# Altium PCB exampleModule_TYPE3042.PcbDoc
Units mm, origin at the board's own origin, x right, y up, seen from the top; angles counter-clockwise.
Board outline 42 x 30 mm, 4 copper layers (Top Layer, Int1 (GND), Int2 (PWR), Bottom Layer), stack 0.77 mm thick; 1 components, 39 nets, 67 pads, 0 vias.
Unrouted connection lines stored in the file: 14.
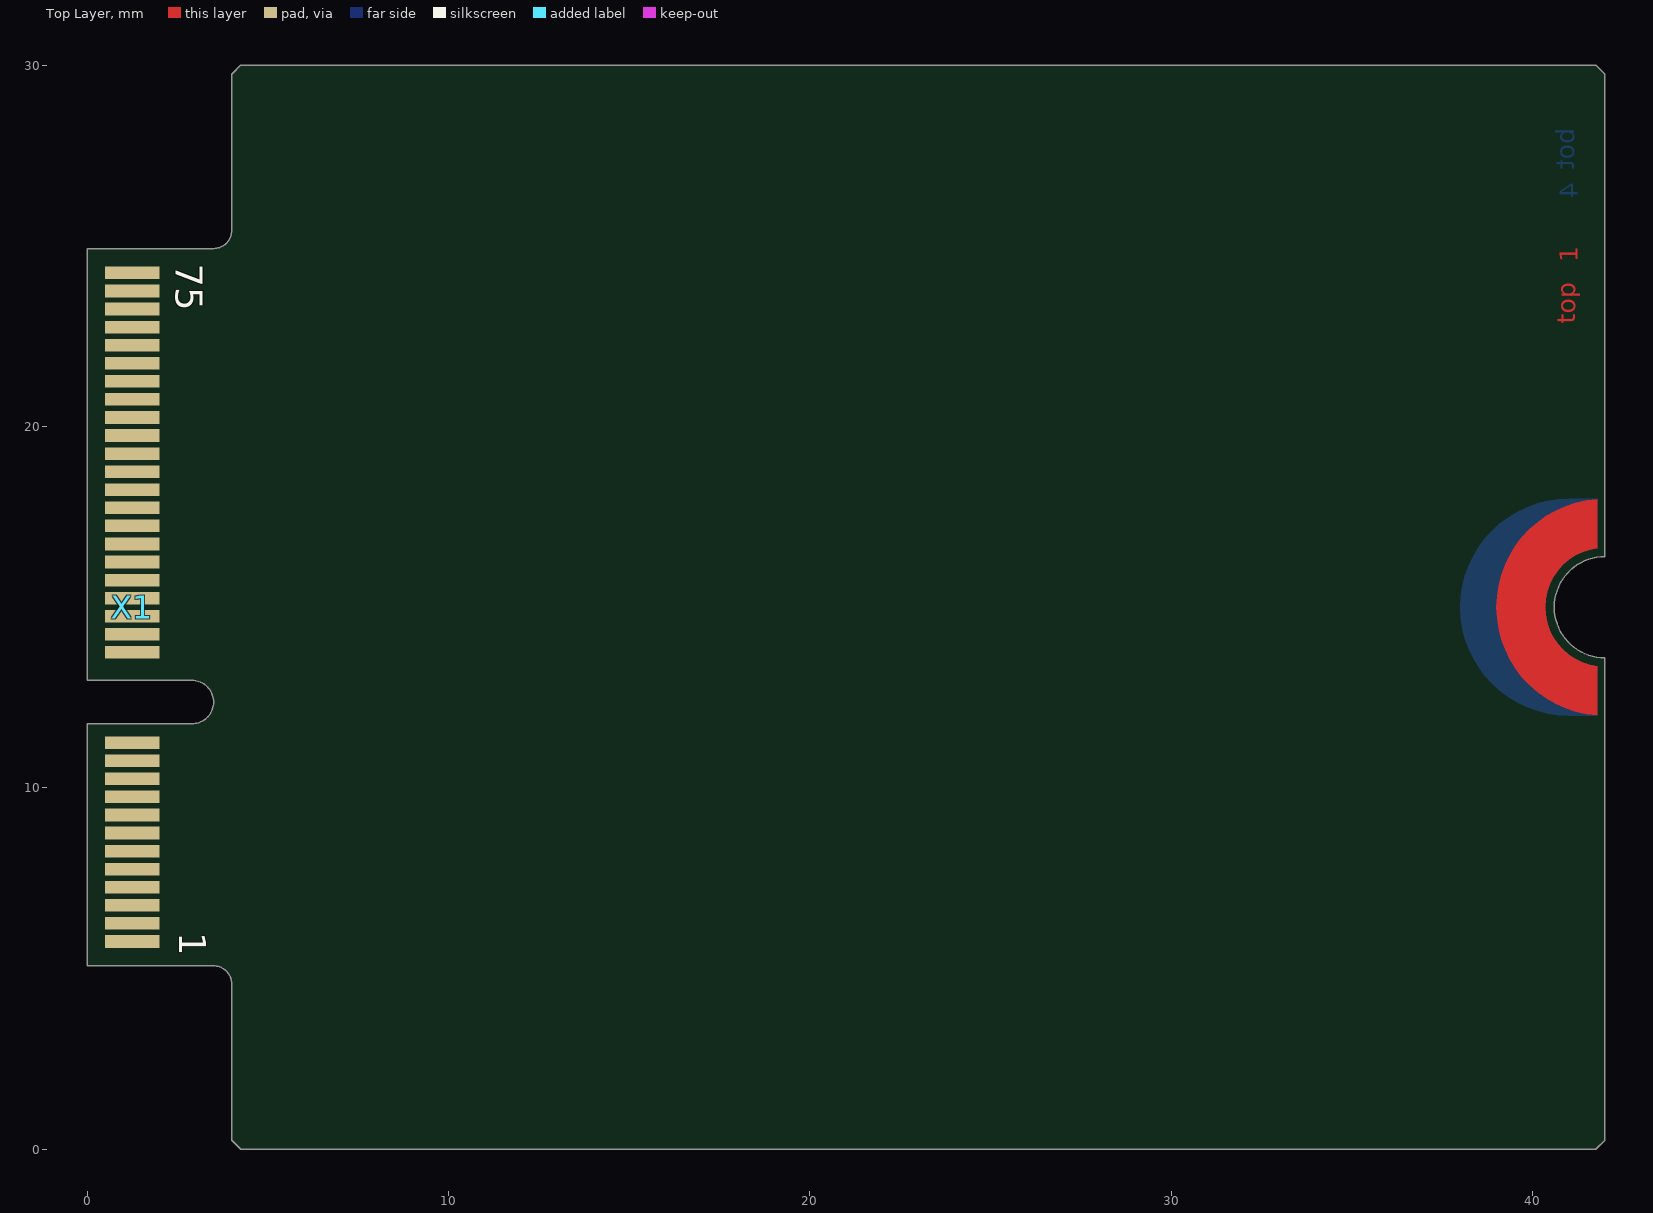
[diagram p0: Top Layer view]
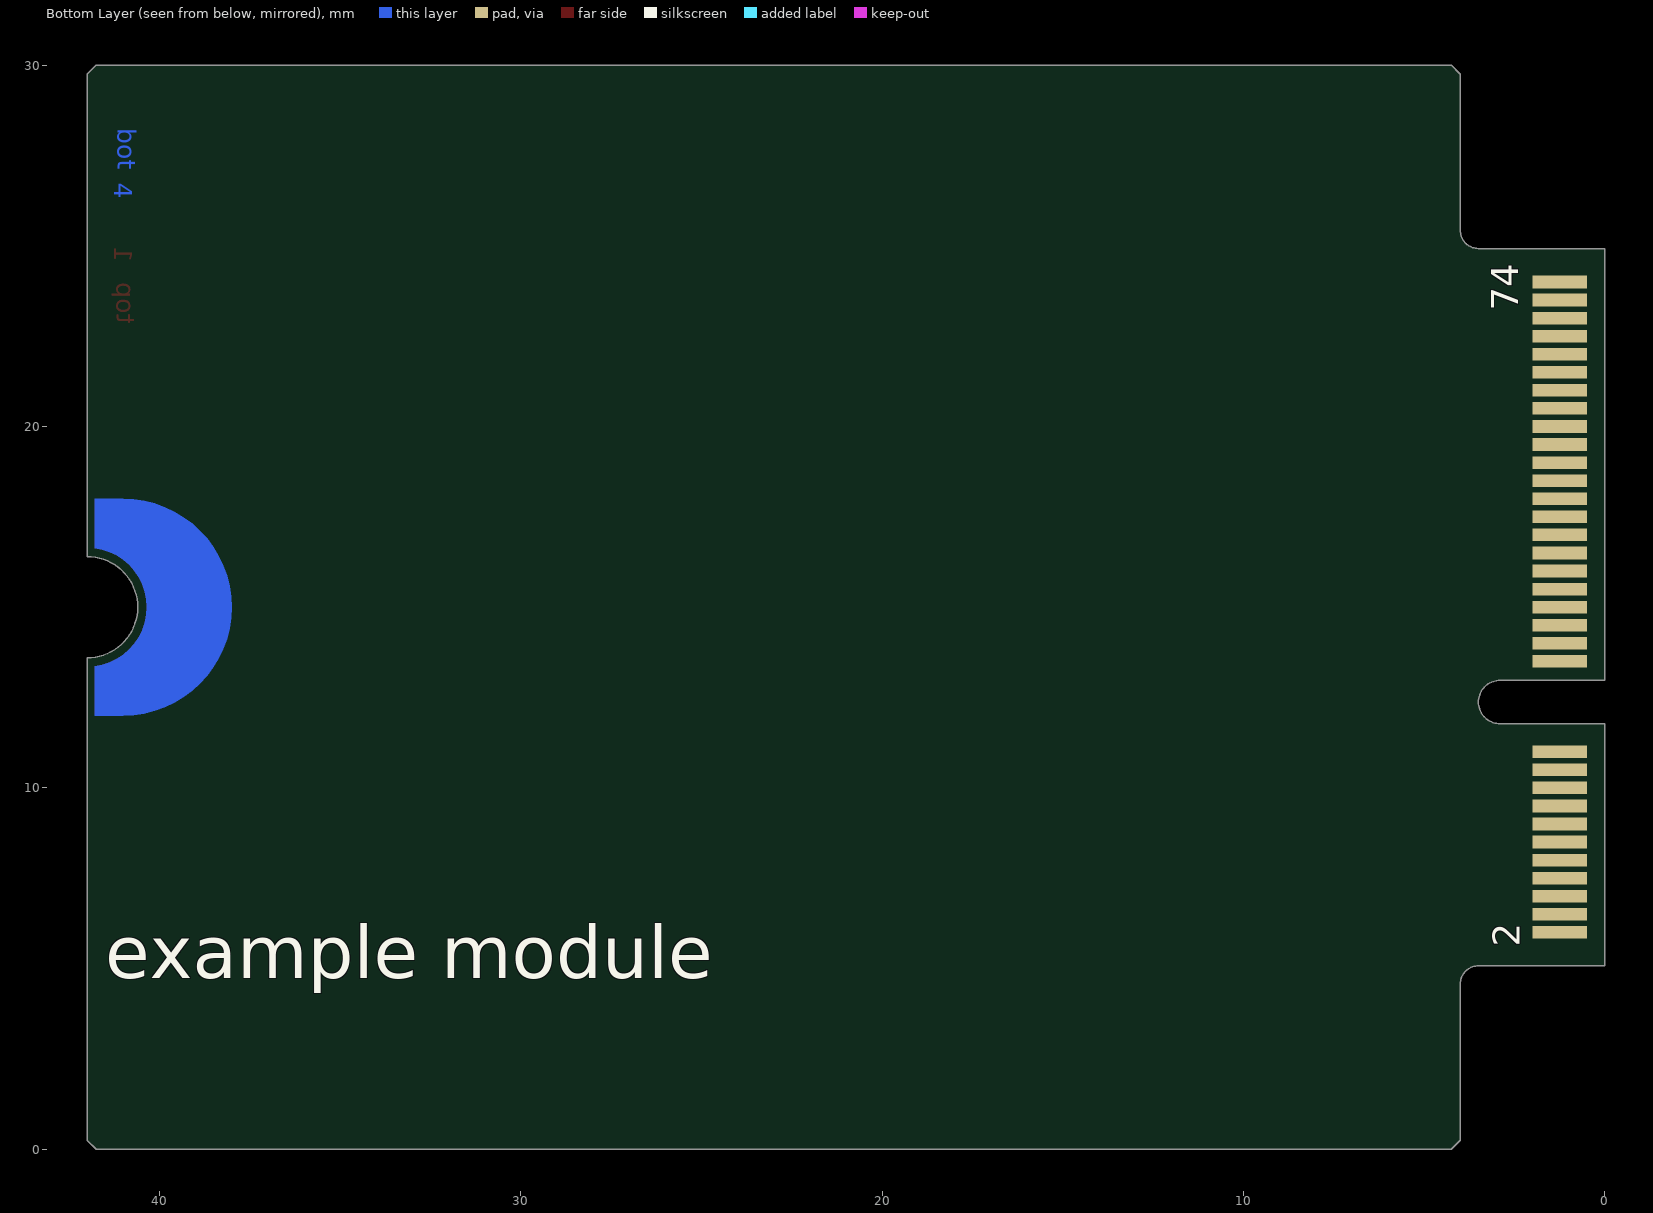
[diagram p1: Bottom Layer view, seen from below]
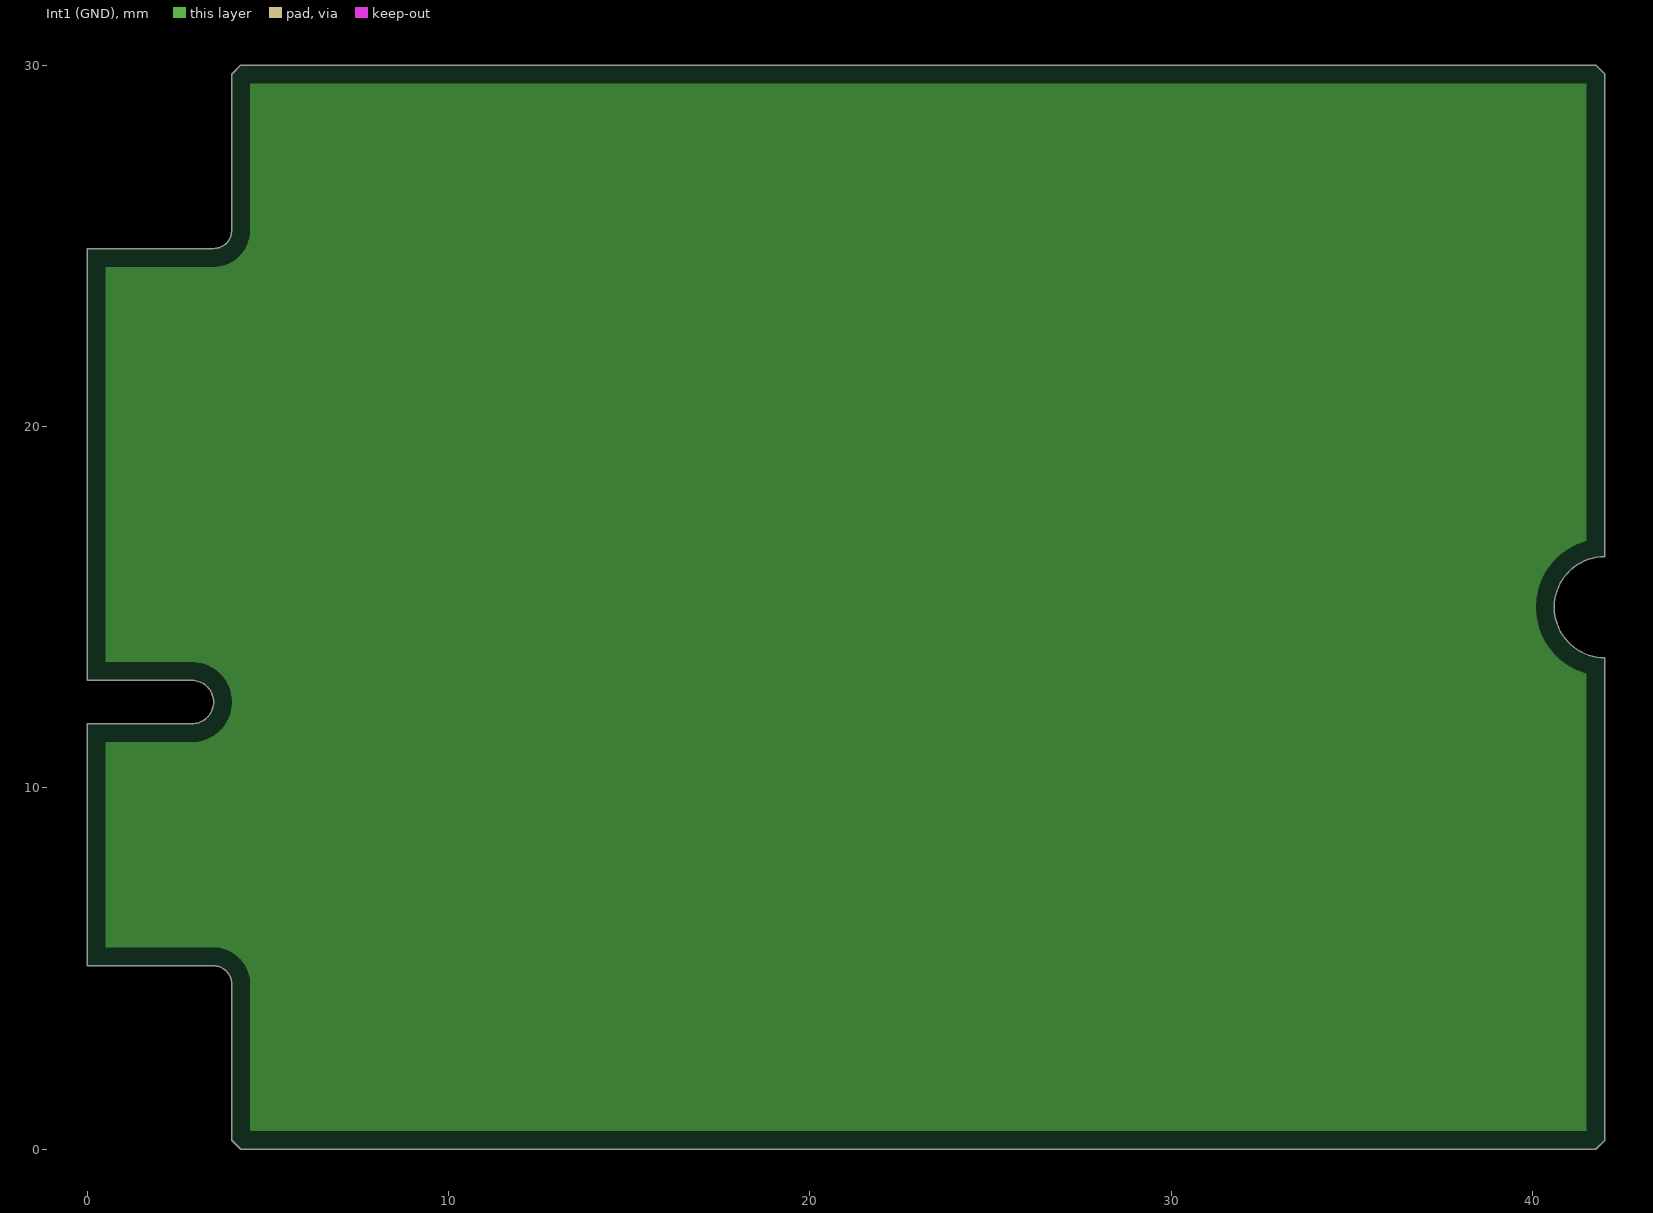
[diagram p2: Int1 (GND), clearances drawn from the general rule]
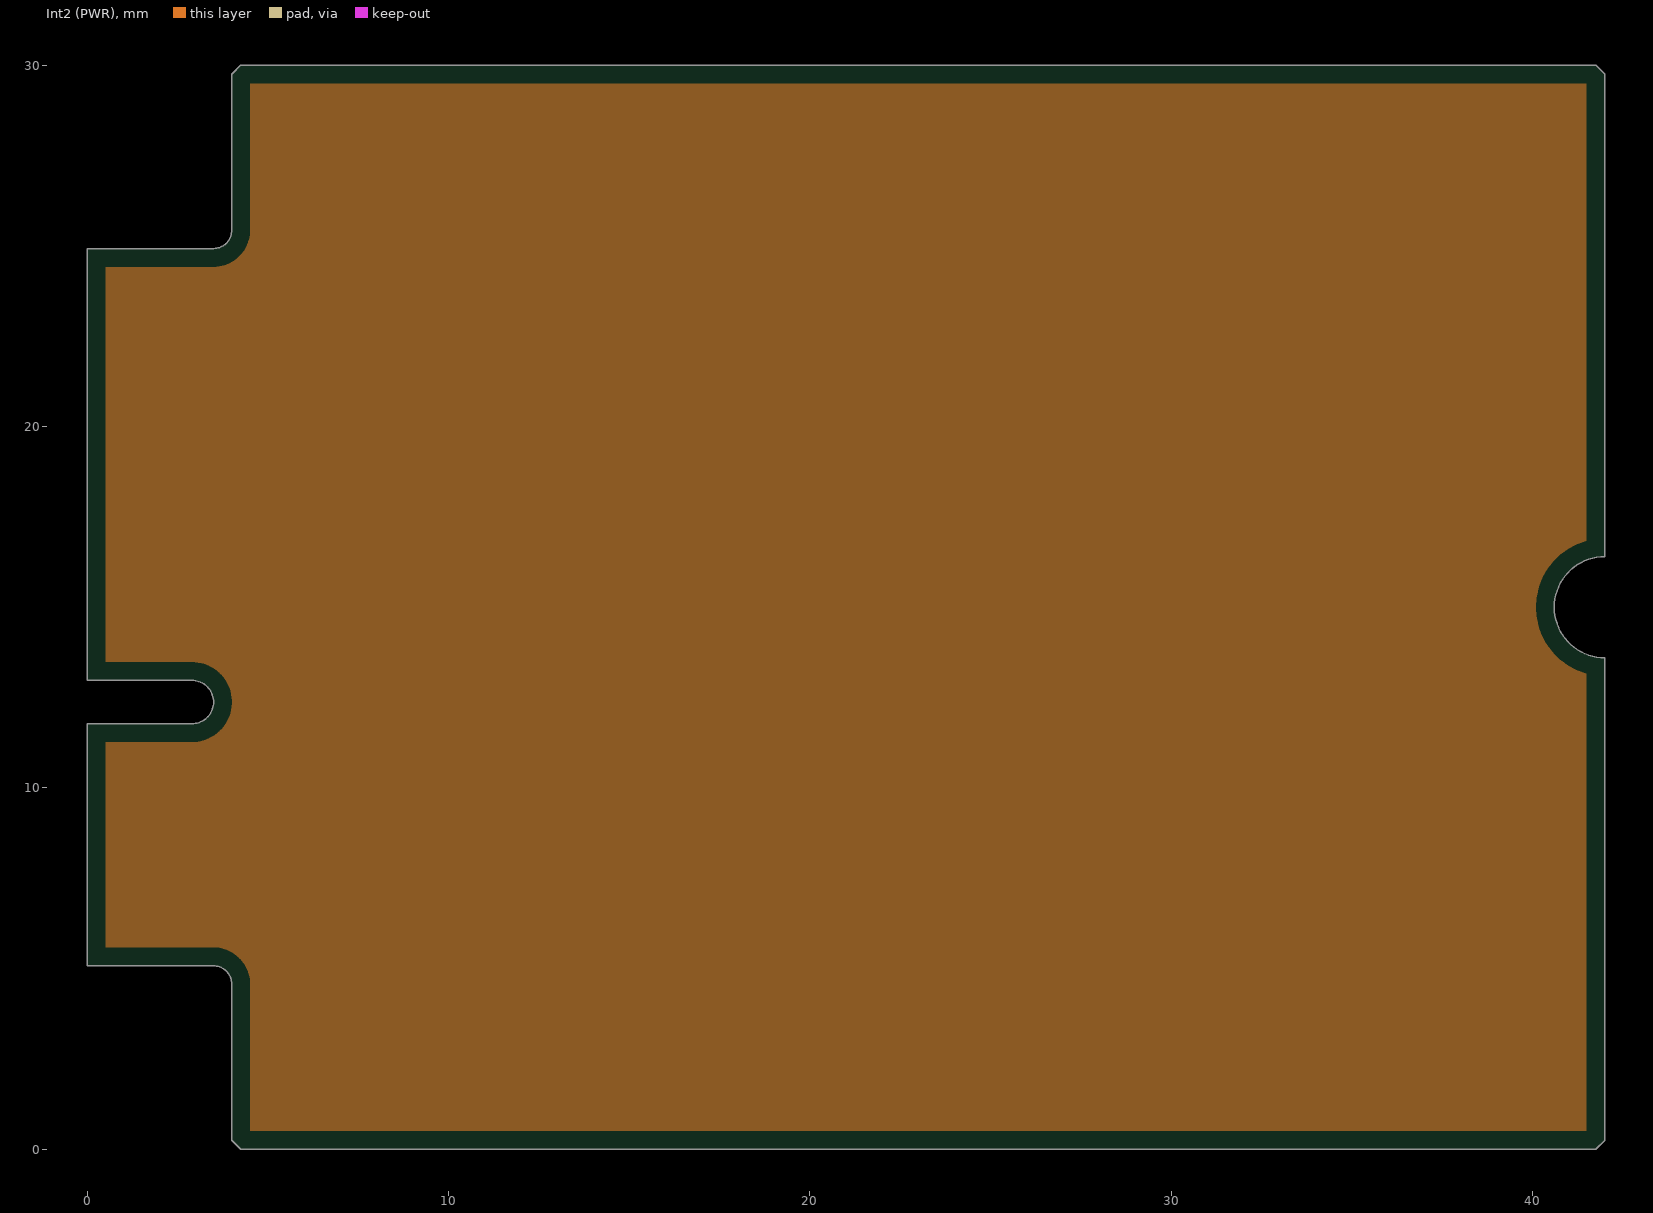
[diagram p3: Int2 (PWR), clearances drawn from the general rule]

## Layer stack, top to bottom
Top Solder: solder mask 0.0254, SM-001, Dk 4
Top Layer: signal copper 0.035
Dielectric 1: prepreg 0.1118, PP-015, Dk 4.3
Int1 (GND): plane copper 0.035
Dielectric 3: core 0.4064, Core-034, Dk 4.6
Int2 (PWR): plane copper 0.035
Dielectric 5: prepreg 0.1118, PP-015, Dk 4.3
Bottom Layer: signal copper 0.035
Bottom Solder: solder mask 0.0254, SM-001, Dk 4

## Board outline
4,0.25 4,4.575 ccw(c3.5,4.575) 3.5,5.075 0,5.075 0,11.775 2.9,11.775 ccw(c2.9,12.375) 3.5,12.375 ccw(c2.9,12.375) 2.9,12.975 0,12.975 0,24.925 3.5,24.925 ccw(c3.5,25.425) 4,25.425 4,29.75 4.25,30 41.75,30 42,29.75 42,16.4 ccw(c42,15) 40.6,15 ccw(c42,15) 42,13.6 42,0.25 41.75,0 4.25,0

## Design rules (kind name [scope] priority, off if disabled: settings)
BoardOutlineClearance [All] p1: gap=0.2 ignorepadtopadclearanceinfootprint=FALSE
Clearance [All] p1: gap=0.1 ignorepadtopadclearanceinfootprint=FALSE
DiffPairsRouting DiffPairsRouting_100R [InDifferentialPairClass('DP_100R')] p1: maxlimit=0.15 minlimit=0.15 mostfreqgap=0.15 toplayer_minwidth=0.11 toplayer_maxwidth=0.11 toplayer_prefwidth=0.11 bottomlayer_minwidth=0.11 bottomlayer_maxwidth=0.11 bottomlayer_prefwidth=0.11 impedanceprofiledriven=TRUE impedanceprofileid={D0ED966C-66EA-42B8-8657-787F2A77329B} impedanceprofilevalue=100.000000 maxuncoupledlength=12.7
DiffPairsRouting [All] p2: maxlimit=0.254 minlimit=0.254 mostfreqgap=0.254 toplayer_minwidth=0.381 toplayer_maxwidth=0.381 toplayer_prefwidth=0.381 bottomlayer_minwidth=0.381 bottomlayer_maxwidth=0.381 bottomlayer_prefwidth=0.381 maxuncoupledlength=12.7
PlaneClearance [All] p1: clearance=0.508
PlaneConnect [All] p1: pad.planeconnectstyle=Relief pad.reliefexpansion=0.508 pad.reliefentries=4 pad.reliefconductorwidth=0.254 pad.reliefairgap=0.254 via.planeconnectstyle=Direct via.reliefexpansion=0.508 via.reliefentries=4 via.reliefconductorwidth=0.254 via.reliefairgap=0.254
PolygonConnect [All] p1: thpad.connectstyle=Relief thpad.reliefconductorwidth=0.254 thpad.reliefentries=4 thpad.polygonreliefangle="90 Angle" thpad.airgapwidth=0.254 smdpad.connectstyle=Relief smdpad.reliefconductorwidth=0.254 smdpad.reliefentries=4 smdpad.polygonreliefangle="90 Angle" smdpad.airgapwidth=0.254 via.connectstyle=Direct via.reliefconductorwidth=0.254 via.reliefentries=4 via.polygonreliefangle="90 Angle" via.airgapwidth=0.254
RoutingVias [All] p1: holewidth=0.2 width=0.4 viastyle="Through Hole" minholewidth=0.2 minwidth=0.4 maxholewidth=3 maxwidth=6
SolderMaskExpansion [All] p1: expansion=0.102 istentingtop=FALSE
Width Width_50R [InNetClass('SE_50R')] p1: maxlimit=0.172 minlimit=0.172 preferedwidth=0.172 impedanceprofiledriven=TRUE impedanceprofileid={CEA07893-88F1-4413-85C8-7467995CDE0A} impedanceprofilevalue=50.000000 minimp=50.000000 maximp=50.000000 favimp=50.000000
Width [All] p2: maxlimit=4 minlimit=0.1 preferedwidth=0.125
27 further rules are at their usual default settings.

## Classes and differential pairs
differential pair class DP_100R: FMC_GP_D1 FMC_GP_D2 FMC_GP_D3 FMC_GP_D4 FMC_GP_D5 FMC_GP_D6 FMC_GP_D7
net class SE_50R: FMC_GP_S0 FMC_GP_S1 FMC_GP_S2 FMC_GP_S3 FMC_GP_S4 FMC_GP_S5 FMC_GP_S6 FMC_GP_S7
net class S_GP: FMC_GP_S0 FMC_GP_S1 FMC_GP_S2 FMC_GP_S3 FMC_GP_S4 FMC_GP_S5 FMC_GP_S6 FMC_GP_S7
net class FMC_GP_S[0..7]: FMC_GP_S0 FMC_GP_S1 FMC_GP_S2 FMC_GP_S3 FMC_GP_S4 FMC_GP_S5 FMC_GP_S6 FMC_GP_S7
net class FMC_GP_D_P[0..7]: FMC_GP_D_P0 FMC_GP_D_P1 FMC_GP_D_P2 FMC_GP_D_P3 FMC_GP_D_P4 FMC_GP_D_P5 FMC_GP_D_P6 FMC_GP_D_P7
net class FMC_GP_D_N[0..7]: FMC_GP_D_N0 FMC_GP_D_N1 FMC_GP_D_N2 FMC_GP_D_N3 FMC_GP_D_N4 FMC_GP_D_N5 FMC_GP_D_N6 FMC_GP_D_N7
net class DP_GP: FMC_GP_D_N1 FMC_GP_D_N2 FMC_GP_D_N3 FMC_GP_D_N4 FMC_GP_D_N5 FMC_GP_D_N6 FMC_GP_D_N7 FMC_GP_D_P1 FMC_GP_D_P2 FMC_GP_D_P3 FMC_GP_D_P4 FMC_GP_D_P5 FMC_GP_D_P6 FMC_GP_D_P7
differential pair FMC_GP_D7: +FMC_GP_D_P7 -FMC_GP_D_N7
differential pair FMC_GP_D6: +FMC_GP_D_P6 -FMC_GP_D_N6
differential pair FMC_GP_D5: +FMC_GP_D_P5 -FMC_GP_D_N5
differential pair FMC_GP_D4: +FMC_GP_D_P4 -FMC_GP_D_N4
differential pair FMC_GP_D3: +FMC_GP_D_P3 -FMC_GP_D_N3
differential pair FMC_GP_D2: +FMC_GP_D_P2 -FMC_GP_D_N2
differential pair FMC_GP_D1: +FMC_GP_D_P1 -FMC_GP_D_N1

## Components (designator, comment, footprint, x,y, rotation, side; value= is the part's Value field where it differs from the comment)
X1 "CONN PWR CARD EDGE PCB SLOT MALE" CON-67_0.5MM_PCB_SLOT 1.25,15 r270 top

## Footprints (in the part's own frame and the unit in brackets; to place one, negate y for a bottom-side part, rotate by r counter-clockwise, add the part's x,y. Pads: shape width x height; smd on the part's side, far side on the other; paste and mask are expansions set on the pad)
CON-67_0.5MM_PCB_SLOT [mm] "Connector 67, 0.5mm pitch - No BOM"
  rect 0.35x1.5 smd: 1(9.25,0) 3(8.75,0) 5(8.25,0) 7(7.75,0) 9(7.25,0) 11(6.75,0) 13(6.25,0) 15(5.75,0) 17(5.25,0) 19(4.75,0) 21(4.25,0) 23(3.75,0) 33(1.25,0) 35(0.75,0) 37(0.25,0) 39(-0.25,0) 41(-0.75,0) 43(-1.25,0) 45(-1.75,0) 47(-2.25,0) 49(-2.75,0) 51(-3.25,0) 53(-3.75,0) 55(-4.25,0) 57(-4.75,0) 59(-5.25,0) 61(-5.75,0) 63(-6.25,0) 65(-6.75,0) 67(-7.25,0) 69(-7.75,0) 71(-8.25,0) 73(-8.75,0) 75(-9.25,0)
  rect 0.35x1.5 smd far side: 2(9,0) 4(8.5,0) 6(8,0) 8(7.5,0) 10(7,0) 12(6.5,0) 14(6,0) 16(5.5,0) 18(5,0) 20(4.5,0) 22(4,0) 32(1.5,0) 34(1,0) 36(0.5,0) 38(0,0) 40(-0.5,0) 42(-1,0) 44(-1.5,0) 46(-2,0) 48(-2.5,0) 50(-3,0) 52(-3.5,0) 54(-4,0) 56(-4.5,0) 58(-5,0) 60(-5.5,0) 62(-6,0) 64(-6.5,0) 66(-7,0) 68(-7.5,0) 70(-8,0) 72(-8.5,0) 74(-9,0)

## Part data
X1: library part CMP-01224-1, "Mates with 2199119-4 - No BOM", Card Thickness=0.8mm, Card Type="Non Specified - Dual Edge", Gender=Male, Mates with=2199119-4, Number of Positions=67, Pitch=0.5mm

## Nets (pads, with @x,y where several pads share a name; then routed paths per layer and width w, separated by ;. In a path a pad name is that pad's centre, name@x,y a point inside that pad or via, vN(x,y) a via of type N, cw(c..) or ccw(c..) an arc to the next point about the centre after c; other vN are vias at no path point)
3V3_CON: X1.2 X1.4 X1.72 X1.74
FMC_12V: X1.38
FMC_ADJ_CON: X1.40 X1.42
FMC_GP_D_N0: X1.5
FMC_GP_D_N1: X1.37
FMC_GP_D_N2: X1.43
FMC_GP_D_N3: X1.49
FMC_GP_D_N4: X1.55
FMC_GP_D_N5: X1.61
FMC_GP_D_N6: X1.67
FMC_GP_D_N7: X1.73
FMC_GP_D_P0: X1.3
FMC_GP_D_P1: X1.35
FMC_GP_D_P2: X1.41
FMC_GP_D_P3: X1.47
FMC_GP_D_P4: X1.53
FMC_GP_D_P5: X1.59
FMC_GP_D_P6: X1.65
FMC_GP_D_P7: X1.71
FMC_GP_S0: X1.9
FMC_GP_S1: X1.11
FMC_GP_S2: X1.13
FMC_GP_S3: X1.15
FMC_GP_S4: X1.17
FMC_GP_S5: X1.19
FMC_GP_S6: X1.21
FMC_GP_S7: X1.23
GND: X1.1 X1.7 X1.18 X1.33 X1.39 X1.45 X1.51 X1.57 X1.63 X1.69 X1.75
I2C_SCL: X1.60
I2C_SDA: X1.58
I2S_CLK: X1.8
I2S_IN: X1.14
I2S_OUT: X1.12
I2S_WS: X1.10
nALERT: X1.62
nLED1: X1.6
nLED2: X1.16
UART_RX: X1.32
UART_TX: X1.22
pads on no net: X1.20 X1.34 X1.36 X1.44 X1.46 X1.48 X1.50 X1.52 X1.54 X1.56 X1.64 X1.66 X1.68 X1.70

## Polygon pours and split planes (outlines as drawn)
no net on Int1 (GND) (split plane): 41.49,16.839 41.445,16.828 41.269,16.765 41.099,16.685 40.939,16.588 40.788,16.477 40.649,16.351 40.523,16.212 40.412,16.061 40.315,15.901 40.235,15.731 40.172,15.555 40.126,15.373 40.099,15.187 40.09,15.003 40.09,15 40.09,14.997 40.099,14.813 40.126,14.627 40.172,14.445 40.235,14.269 40.315,14.099 40.412,13.939 40.523,13.788 40.649,13.649 40.788,13.523 40.939,13.412 41.099,13.315 41.269,13.235 41.445,13.172 41.49,13.161 41.49,0.51 4.51,0.51 4.51,4.575 4.51,4.584 4.502,4.707 4.476,4.836 4.433,4.962 4.375,5.08 4.301,5.19 4.214,5.289 4.115,5.376 4.005,5.45 3.887,5.508 3.761,5.551 3.632,5.577 3.509,5.585 3.5,5.585 0.51,5.585 0.51,11.265 2.9,11.265 2.902,11.265 3.045,11.274 3.187,11.302 3.325,11.349 3.455,11.413 3.576,11.494 3.685,11.59 3.781,11.699 3.862,11.82 3.926,11.95 3.973,12.088 4.001,12.23 4.01,12.373 4.01,12.375 4.01,12.377 4.001,12.52 3.973,12.662 3.926,12.8 3.862,12.93 3.781,13.051 3.685,13.16 3.576,13.256 3.455,13.337 3.325,13.401 3.187,13.448 3.045,13.476 2.902,13.485 2.9,13.485 0.51,13.485 0.51,24.415 3.5,24.415 3.509,24.415 3.632,24.423 3.761,24.449 3.887,24.492 4.005,24.55 4.115,24.624 4.214,24.711 4.301,24.81 4.375,24.92 4.433,25.038 4.476,25.164 4.502,25.293 4.51,25.416 4.51,25.425 4.51,29.49 41.49,29.49
no net on Int2 (PWR) (split plane): 41.49,16.839 41.445,16.828 41.269,16.765 41.099,16.685 40.939,16.588 40.788,16.477 40.649,16.351 40.523,16.212 40.412,16.061 40.315,15.901 40.235,15.731 40.172,15.555 40.126,15.373 40.099,15.187 40.09,15.003 40.09,15 40.09,14.997 40.099,14.813 40.126,14.627 40.172,14.445 40.235,14.269 40.315,14.099 40.412,13.939 40.523,13.788 40.649,13.649 40.788,13.523 40.939,13.412 41.099,13.315 41.269,13.235 41.445,13.172 41.49,13.161 41.49,0.51 4.51,0.51 4.51,4.575 4.51,4.584 4.502,4.707 4.476,4.836 4.433,4.962 4.375,5.08 4.301,5.19 4.214,5.289 4.115,5.376 4.005,5.45 3.887,5.508 3.761,5.551 3.632,5.577 3.509,5.585 3.5,5.585 0.51,5.585 0.51,11.265 2.9,11.265 2.902,11.265 3.045,11.274 3.187,11.302 3.325,11.349 3.455,11.413 3.576,11.494 3.685,11.59 3.781,11.699 3.862,11.82 3.926,11.95 3.973,12.088 4.001,12.23 4.01,12.373 4.01,12.375 4.01,12.377 4.001,12.52 3.973,12.662 3.926,12.8 3.862,12.93 3.781,13.051 3.685,13.16 3.576,13.256 3.455,13.337 3.325,13.401 3.187,13.448 3.045,13.476 2.902,13.485 2.9,13.485 0.51,13.485 0.51,24.415 3.5,24.415 3.509,24.415 3.632,24.423 3.761,24.449 3.887,24.492 4.005,24.55 4.115,24.624 4.214,24.711 4.301,24.81 4.375,24.92 4.433,25.038 4.476,25.164 4.502,25.293 4.51,25.416 4.51,25.425 4.51,29.49 41.49,29.49

## Other copper
Top Layer:
  region: 41.79,12.007 cw(c42,15) 41.79,17.993 41.79,16.637 ccw(c42,15) 41.79,13.363
  text "1" at 41.25,24.55 h0.5 r90
  text "top" at 41.183,22.85 h0.5 r90
Bottom Layer:
  region: 41,12 cw(c41,15) 41,18 41.79,18 41.79,16.637 ccw(c42,15) 41.79,13.363 41.79,12
  text "bot" at 41.15,28.25 h0.5 r90
  text "4" at 41.25,26.75 h0.5 r90
Int1 (GND) (plane layer: these items are gaps in the copper):
  text "2" at 41.25,25.05 h0.5 r90
Int2 (PWR) (plane layer: these items are gaps in the copper):
  text "3" at 41.25,25.75 h0.5 r90

## Silkscreen, mask and mechanical layers (free items; w line width, h text height)
Bottom Overlay:
  text "example module" at 41.5,4.25 h2.5
Top Solder:
  region: 42,12 cw(c42,15) 42,18
Bottom Solder:
  region: 41,12 cw(c41,15) 41,18 42,18 42,12
Mechanical 4:
  the board outline again, w0
Mechanical 6:
  lines w0.1: 29,4 29.75,4 30,4.25 ; 29,26 29.75,26 30,25.75 ; 29.75,0 30,0.25 30,4.25 ; 29.75,30 30,29.75 30,25.75 ; 4,4.25 4,0.25 4.25,0 41.75,0 42,0.25 42,4.25 ; 4,4.25 4,4.575 ccw(c3.5,4.575) 3.5,5.075 0,5.075 0,11.775 2.9,11.775 ccw(c2.9,12.375) 3.5,12.375 ccw(c2.9,12.375) 2.9,12.975 0,12.975 0,24.925 3.5,24.925 ccw(c3.5,25.425) 4,25.425 4,25.75 ; 4,4.25 4.25,4 5,4 41,4 41.75,4 42,4.25 ; 4,25.75 4,29.75 4.25,30 41.75,30 42,29.75 42,25.75 ; 4,25.75 4.25,26 5,26 41,26 41.75,26 42,25.75 ; 27,15 cw(c30,15) 30,18 ; 27,15 ccw(c30,15) 30,12 ; 27,15 27,15 ; 30,4.25 30,13.6 ; 30,12 30,13.6 ; 30,12 29,12 cw(c29,15) 26,15 cw(c29,15) 29,18 30,18 ; 30,13.6 cw(c30,15) 28.6,15 cw(c30,15) 30,16.4 ; 30,16.4 30,25.75 ; 30,16.4 30,18 ; 39,15 cw(c42,15) 42,18 ; 39,15 ccw(c42,15) 42,12 ; 39,15 39,15 ; 42,4.25 42,13.6 ; 42,12 41,12 cw(c41,15) 38,15 cw(c41,15) 41,18 42,18 ; 42,12 42,13.6 ; 42,13.6 cw(c42,15) 40.6,15 cw(c42,15) 42,16.4 ; 42,16.4 42,18 ; 42,16.4 42,25.75
  text "TYPE2230" at 21.35,4.35 h1
  text "TYPE2242" at 33.35,4.35 h1
  text "TYPE3030" at 21.35,0.35 h1
  text "TYPE3042" at 33.35,0.35 h1

## Text inside footprints (layer, text, board x,y; h text height)
X1: Top Overlay "1" at 2.55,6 h0.75 r270; Top Overlay "75" at 2.45,24.5 h0.75 r270; Mechanical 1 "Board Edge" at -1.65,19 h0.8 r270; Mechanical 1 "Final Board Thickness: 0.8 +-0.08mm" at -3.85,24.3 h0.8 r270; Mechanical 1 "20-degree chamfered border from this line" at -5.15,5 h0.5 r270; Mechanical 1 "All pads hard gold finished" at 0.05,29.8 h0.5 r270; Bottom Overlay "74" at 2.4,23.2 h0.75 r270; Bottom Overlay "2" at 2.35,5.6 h0.75 r270